# Altium PCB usb to uart.PcbDoc
Units mil, origin at the board's own origin, x right, y up, seen from the top; angles counter-clockwise.
Board outline 1305 x 655 mil, 2 copper layers (Top Layer, Bottom Layer); 12 components, 11 nets, 60 pads, 10 vias.
Unrouted connection lines stored in the file: 2.
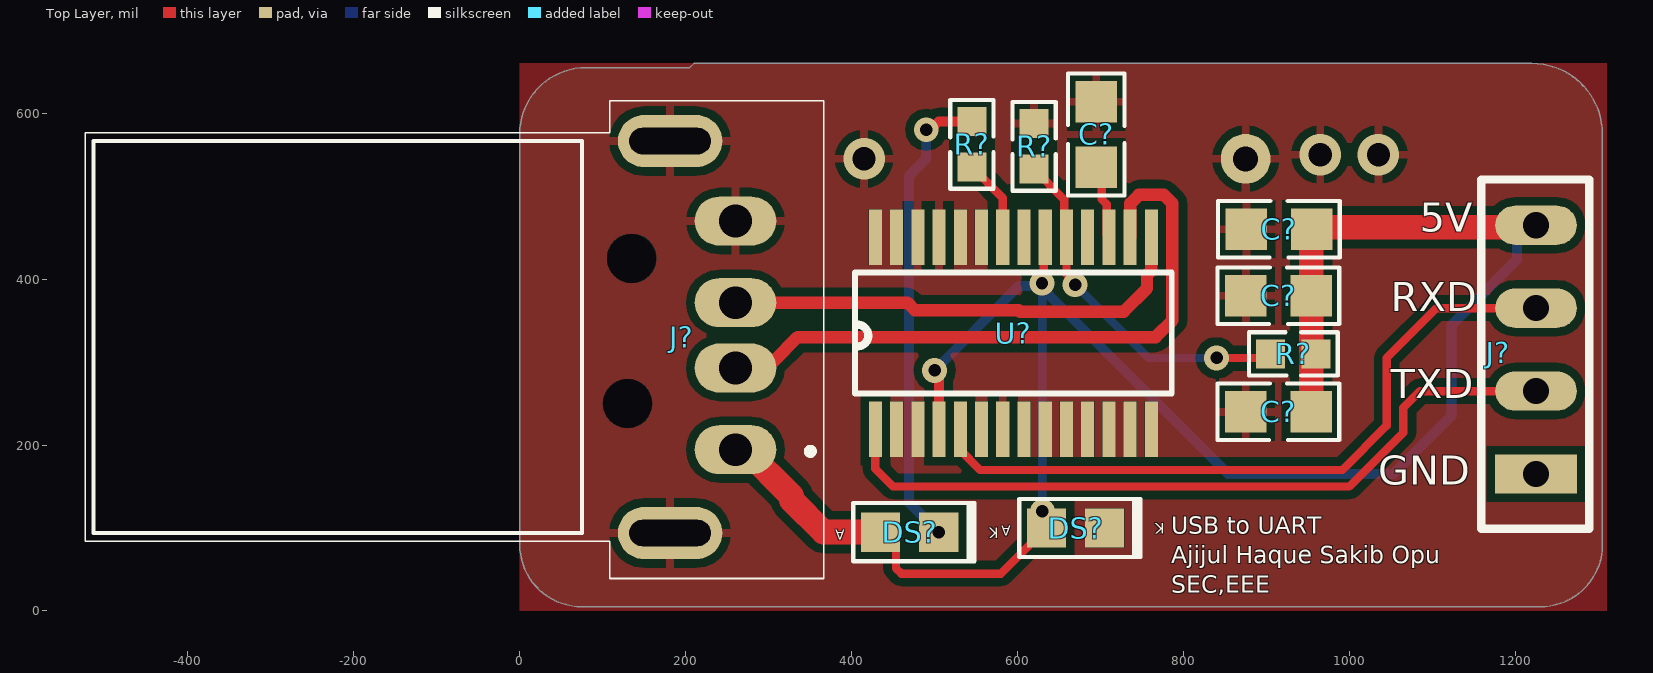
[diagram p0: Top Layer view]
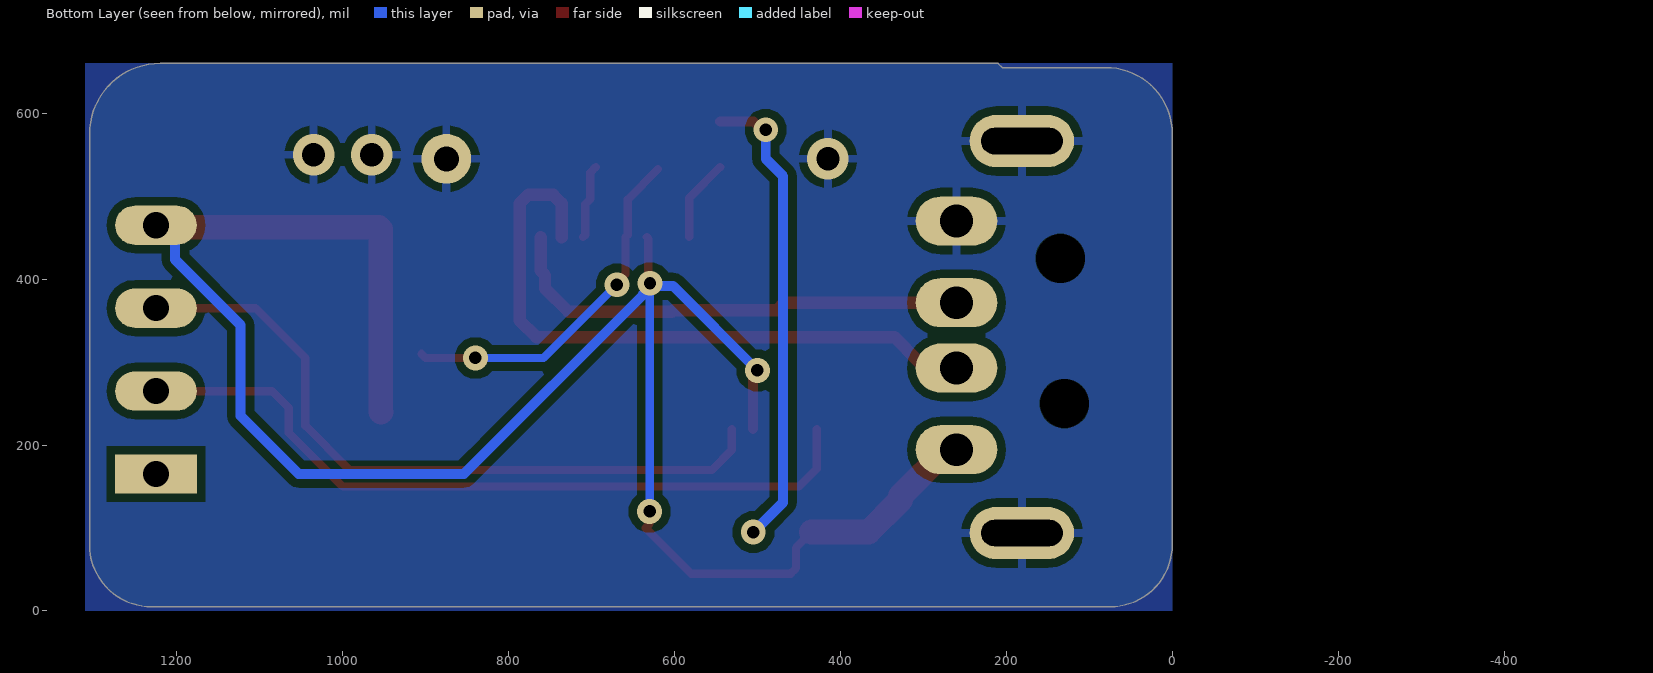
[diagram p1: Bottom Layer view, seen from below]

## Layer stack, top to bottom
Top Solder: solder mask 0.4, Solder Resist, Dk 3.5
Top Layer: signal copper 1.4
Dielectric 1: dielectric 12.6, FR-4, Dk 4.8
Bottom Layer: signal copper 1.4
Bottom Solder: solder mask 0.4, Solder Resist, Dk 3.5

## Board outline
75,5 cw(c75,80) 0,80 0,575 cw(c80,575) 80,655 205,655 210,660 1220,660 cw(c1220,575) 1305,575 1305,80 cw(c1230,80) 1230,5

## Design rules (kind name [scope] priority, off if disabled: settings)
Clearance [InNetClass('All Nets') vs InNetClass('All Nets')] p1: gap=10 ignorepadtopadclearanceinfootprint=TRUE
DiffPairsRouting [InDifferentialPair('No Differential Pair')] p1: maxlimit=10 minlimit=5 mostfreqgap=10 toplayer_minwidth=10 toplayer_maxwidth=15 toplayer_prefwidth=15 bottomlayer_minwidth=10 bottomlayer_maxwidth=15 bottomlayer_prefwidth=15 maxuncoupledlength=500
PolygonConnect [All] p1: connectstyle=Relief reliefconductorwidth=10 reliefentries=4 polygonreliefangle="90 Angle" airgapwidth=10
RoutingVias [All] p1: holewidth=15 width=30 viastyle="Through Hole" minholewidth=15 minwidth=30 maxholewidth=15 maxwidth=30
SolderMaskExpansion [All] p1: expansion=4 istentingtop=FALSE
Width [All] p1: maxlimit=50 minlimit=10 preferedwidth=12
29 further rules are at their usual default settings.

## Classes and differential pairs
component class "USB TO UART": C? DS? J? U?
differential pair NewDifferentialPair1: +D_+ -D_-

## Components (designator, comment, footprint, x,y, rotation, side; value= is the part's Value field where it differs from the comment)
C? "4.7uf" CAP_0805 914.37,380 r0 top
C? "100nF" CAP_0805 915,460 r0 top
C? "100nF" CAP_0805 695,574.37 r270 top
C? "100nF" CAP_0805 914.37,240 r0 top
DS? "RED LED" LED_0805 670,100 r180 top
DS? "GREEN LED" LED_0805 470,95 r180 top
J? "USB-05" USB2.0_TYPE-A_TH 181.26,330.2 r270 top
J? "4X1 BERG STRIP" CON4_100_40D72_TH_ST_MALE 1225,165 r180 top
R? "4.7K" RES_0603 932.5,310 r0 top
R? "10K" RES_0603 620,560 r270 top
R? "750R" RES_0603 545,562.5 r270 top
U? "FT232RL" TSSOP28_25.5_295_15X58_SMD 595,335 r90 top

## Footprints (in the part's own frame and the unit in brackets; to place one, negate y for a bottom-side part, rotate by r counter-clockwise, add the part's x,y. Pads: shape width x height; smd on the part's side, far side on the other; paste and mask are expansions set on the pad)
CAP_0805 [mil] "Ceramic Capacitor"
  rect 50x50 smd mask+3: 1(-39.37,0) 2(39.37,0)
  silkscreen extent -73,-34 73,34, body extent -39,-25 39,25, height 31
CON4_100_40D72_TH_ST_MALE [mm] "Berg Strip"
  rect 2.5x1.2 hole 0.8 mask+0.102: 1(0,0)
  oval 2.5x1.2 hole 0.8 mask+0.102: 2(0,-2.54) 3(0,-5.08) 4(0,-7.62)
  round 1.016 on Top Overlay: ""(2.311,0.178)
  silkscreen extent -1.63,-9.02 1.68,1.68, body extent -1.14,-8.76 1.4,1.4, height 8.55
LED_0805 [mm] "LED"
  rect 1.2x1.2 smd mask+0.076: A(0.889,0) K(-0.889,0)
  silkscreen extent -1.99,-0.89 1.73,0.89, body extent -1.01,-0.62 1.01,0.63, height 1.1
RES_0603 [mil] "CASE: 0603"
  rect 35x35 smd mask+3: 1(-27.5,0) 2(27.5,0)
  silkscreen extent -53,-26 54,26, body extent -31,-16 31,16, height 18
TSSOP28_25.5_295_15X58_SMD [mm] "CASE: TSSOP"
  rect 1.7x0.4 smd mask+0.076: 1(-2.938,4.225) 2(-2.938,3.575) 3(-2.938,2.925) 4(-2.938,2.275) 5(-2.938,1.625) 6(-2.938,0.975) 7(-2.938,0.325) 8(-2.938,-0.325) 9(-2.938,-0.975) 10(-2.938,-1.625) 11(-2.938,-2.275) 12(-2.938,-2.925) 13(-2.938,-3.575) 14(-2.938,-4.225) 15(2.938,-4.225) 16(2.938,-3.575) 17(2.938,-2.925) 18(2.938,-2.275) 19(2.938,-1.625) 20(2.938,-0.975) 21(2.938,-0.325) 22(2.938,0.325) 23(2.938,0.975) 24(2.938,1.625) 25(2.938,2.275) 26(2.938,2.925) 27(2.938,3.575) 28(2.938,4.225)
  silkscreen extent -1.85,-4.85 1.85,4.85, body extent -3.2,-4.85 3.2,4.85, height 1.1
USB2.0_TYPE-A_TH [mm] "USB 2.0 TYPE A"
  oval 1.5x2.5 hole 1 mask+0.102: 1(3.449,2) 2(0.949,2) 3(-1.051,2) 4(-3.551,2)
  round 1.1 hole 1.5 unplated mask+0.102: None(-2.408,-1.175) None(2.037,-1.302)
  oval 1.6x3.2 hole 0.8 slot 2.5 at 90 deg mask+0.102: S1(-6,0) S2(6,0)
  silkscreen extent -7.24,-17.9 7.39,4.7, body extent -6.18,-18.09 6.25,3.51, height 4.5

## Part data
C? C? C? C?: library part CAP_100pF-50V-5%-0805, "100pF ±5% 50V Ceramic Capacitor C0G, NP0 0805 (2012 Metric)", Alternate Part Number-1=NA, Case/Package=0805, Manufacturer=KEMET, Manufacturer Part Number=CC0805JRNPO9BN101, Supplier Part Number-1=0805N101J500LT, Supplier-1=SIRICOM
DS?: library part LED_RED-2V-20mA-0805, "Red 631nm LED Indication - Discrete 2V 0805 (2012 Metric)", Alternate Part Number-1=NA, Case/Package=0805, Manufacturer="Vishay Lite-On", Manufacturer Part Number=LTST-C171KRKT, Supplier Part Number-1=LTST-C171KRKT, Supplier-1="SP ROAD"
DS?: library part LED_GREEN-2.2-20mA-0805, "Green 569nm LED Indication - Discrete 2.1V 0805 (2012 Metric)", Alternate Part Number-1=NA, Case/Package=0805, Manufacturer="Vishay Lite-On", Manufacturer Part Number=LTST-C171GKT, Supplier Part Number-1=LTST-C171GKT, Supplier-1="SP ROAD"
J?: library part CON-PLG_USB-TYPE-A-TH, "USB Connectors USB CONN PLUG RA SMT POST 1.1 REEL", Alternate Part Number-1=NA, Case/Package=TH, Manufacturer="TE Connectivity", Supplier Part Number-1=C112454, Manufacturer Part Number=USB-05, Supplier-1=LCSC
J?: library part CON-BS-PLG_4X1-100-ST-TH, "4 Pins, 1 Row 2.54mm Pitch, Straight bergstrip, Male", Alternate Part Number-1=NA, Case/Package=TH-CON, Manufacturer=NA, Manufacturer Part Number=NA, Supplier Part Number-1=NA, Supplier-1="SP ROAD"
R?: library part RES_4.7K-0.1W-1%-0603, "4.7 kOhms ±1% 0.1W, 1/10W Chip Resistor 0603 (1608 Metric) Moisture Resistant Thick Film", Alternate Part Number-1=MR06X4701FTL, Case/Package=0603, Manufacturer=Walsin, Manufacturer Part Number=WR06X4701FTL, Supplier Part Number-1=WR06X4701FTL, Supplier-1=SIRICOM
R?: library part RES_10K-0.1W-1%-0603, "10 kOhms ±1% 0.1W, 1/10W Chip Resistor 0603 (1608 Metric) Automotive AEC-Q200 Thick Film", Alternate Part Number-1=0603WAJ0103T5E, Case/Package=0603, Manufacturer=Walsin, Manufacturer Part Number=WR06X1002FTL, Supplier Part Number-1=WR06X1002FTL, Supplier-1=SIRICOM
R?: library part RES_750R-0.1W-1%-0603, "750 ±1% 0.1W, 1/10W Chip Resistor 0603 (1608 Metric) Moisture Resistant Thick Film", Alternate Part Number=NA, Case/Package=0603, Manufacturer="Bourns Inc.", Manufacturer Part Number=CR0603-FX-7500ELF, Supplier Part Number-1="CR0603-FX-7500ELFCT-ND - Cut Tape (CT)", Supplier-1=Digikey
U?: library part IC_FT232RL, "USB Bridge, USB to UART USB 2.0 UART Interface 28-SSOP", Alternate Part Number-1=NA, Case/Package=TSSOP28, Manufacturer=FTDI, Manufacturer Part Number=FT232RL, Supplier Part Number-1=FT232RL, Supplier-1=Aliepress

## Free pads (board coordinates)
  round 60 hole 30 mask+4: 2(875,545)

## Via types
v1: diameter 30, hole 15, Top Layer to Bottom Layer, tented both sides, 7 vias
v2: diameter 50, hole 28, Top Layer to Bottom Layer, tented both sides, 3 vias

## Nets (pads, with @x,y where several pads share a name; then routed paths per layer and width w, separated by ;. In a path a pad name is that pad's centre, name@x,y a point inside that pad or via, vN(x,y) a via of type N, cw(c..) or ccw(c..) an arc to the next point about the centre after c; other vN are vias at no path point)
3V3: J?.1@1225,165
D_+: J?.3@260,371.57 U?.15 | length 576.2
  Top Layer w15: J?.3@260,371.57 467.21,371.57 476.29,362.5 601.29,362.5 603.02,360.77 728.02,360.77 756.04,388.79 756.04,404.88 761.12,409.96 761.12,450.45 U?.15
D_-: J?.2@260,292.83 U?.16 | length 791.6
  Top Layer w15: J?.2@260,292.83 268.43,301.26 306.26,301.26 335,330 766.4,330 786.71,350.31 786.71,491.38 776.46,501.63 746.22,501.63 735.96,491.38 735.96,450.89 U?.16
GND: C?.1 J?.4@260,470 J?.S1 J?.S2 pad.2 R?.1@620,587.5 U?.7 U?.18 U?.21 U?.25 U?.26
  other v2: 415,545 965,550 1035,550
NetC?_2: C?.2@695,535 U?.17 | length 90.6
  Top Layer w10: C?.2@695,535 701.39,528.61 701.39,496.39 707.44,490.35 707.44,453.39 U?.17
NetDS?_K: DS?.K@505,95 R?.1@545,590 | length 567.8
  Top Layer w12: v1(490,580) 494.87,580 504.87,590 R?.1@545,590
  Bottom Layer w12: v1(490,580) 490,545 469,524 469,131 v1(505,95)
NetR?_2: R?.2@545,535 U?.22 | length 99.7
  Top Layer w10: R?.2@545,535 582.2,497.8 U?.22
RESET: R?.1@905,310 R?.2@620,532.5 U?.19 | length 433.9
  Top Layer w10: R?.2@620,532.5 656.26,496.24 656.26,453.39 U?.19 658.98,406.02 669.48,395.52 v1(669.48,393.27) ; v1(840,305) 900,305 R?.1@905,310
  Bottom Layer w10: v1(669.48,393.27) 757.75,305 v1(840,305)
RXD: J?.3@1225,365 U?.5 | length 858
  Top Layer w10: U?.5 531.02,193.74 554.76,170 991.72,170 1045,223.28 1045,305 1105,365 J?.3@1225,365
TXD: J?.2@1225,265 U?.1 | length 918.4
  Top Layer w10: U?.1 428.66,171.34 450,150 1000,150 1065,215 1065,245 1085,265 J?.2@1225,265
VCC: C?.2@953.74,240 C?.2@953.74,380 C?.2@954.37,460 DS?.A J?.1@260,194.41 J?.4@1225,465 R?.2@960,310 U?.4 U?.20 | length 2462.8
  Top Layer w10: DS?.A@435,95 453.62,76.38 453.62,51.38 460,45 580,45 635,100 630,105 v1(630,120) ; v1(629.52,395.02) 631.45,396.96 631.45,448.73 U?.20
  Top Layer w12: v1(500,290) 500,285.13 505,280.13 505,280 505.43,279.57 U?.4
  Top Layer w30: J?.1@260,194.41 271.82,194.41 327.67,138.56 327.67,133.71 366.38,95 DS?.A@435,95 ; C?.2@953.74,240 954.06,240.32 954.06,459.69 954.37,460 956.87,462.5 1222.5,462.5 J?.4@1225,465
  Bottom Layer w10: v1@629.76,389.91 629.76,120.24 v1(630,120)
  Bottom Layer w12: v1(500,290) 601.58,391.58 626.07,391.58 v1(629.52,395.02) 629.52,390.15 629.76,389.91 638.48,381.19 638.48,380.43 853.91,165 1052.97,165 1122.82,234.85 1122.82,344.44 1201.75,423.38 1201.75,448.72 1218.03,465 J?.4@1225,465
pads on no net: DS?.K@705,100 J?. J?.None U?.2 U?.3 U?.6 U?.8 U?.9 U?.10 U?.11 U?.12 U?.13 U?.14 U?.23 U?.24 U?.27 U?.28

## Polygon pours and split planes (outlines as drawn)
GND on Bottom Layer "GND_L02_P003" (solid, remove dead copper, pour order 3): 0,0 1310,0 1310,660 0,660
GND on Bottom Layer "GND_L02_P000" (solid, remove dead copper, pour order 0): 835,515 910,515 910,195 835,195
GND on Top Layer "GND_L01_P002" (solid, remove dead copper, pour order 2): 0,0 1310,0 1310,660 0,660
GND on Top Layer "GND_L01_P001" (solid, remove dead copper, pour order 1): 835,580 910,580 910,195 835,195

## Silkscreen, mask and mechanical layers (free items; w line width, h text height)
Top Overlay:
  text "5V" at 1085,445.78 h60
  text "RXD" at 1050,350 h60
  text "TXD" at 1050,245 h60
  text "GND" at 1035,140.78 h60
  text "USB to UART / Ajijul Haque Sakib Opu / SEC,EEE" at 785,15 h35.43
Mechanical 1:
  lines w20: 0,80 ccw(c75,80) 75,5 85,5 1230,5 ccw(c1230,80) 1305,80 1305,575 ccw(c1220,575) 1220,660 210,660 205,655 80,655 ccw(c80,575) 0,575 0,80

## Text inside footprints (layer, text, board x,y; h text height)
DS?: Top Overlay "K" at 777.28,109.84 h22 r180; Top Overlay "A" at 591.75,106.89 h20 r180
DS?: Top Overlay "K" at 577.28,104.84 h22 r180; Top Overlay "A" at 391.75,101.89 h20 r180